# Altium PCB PCB1.PcbDoc (part 2 of 3)
Units mil, origin at the board's own origin, x right, y up, seen from the top; angles counter-clockwise.
Board outline 970.61 x 1495 mil, 4 copper layers (Top Layer, Mid-Layer 1, Mid-Layer 2, Bottom Layer); 18 components, 0 nets, 96 pads, 58 vias.
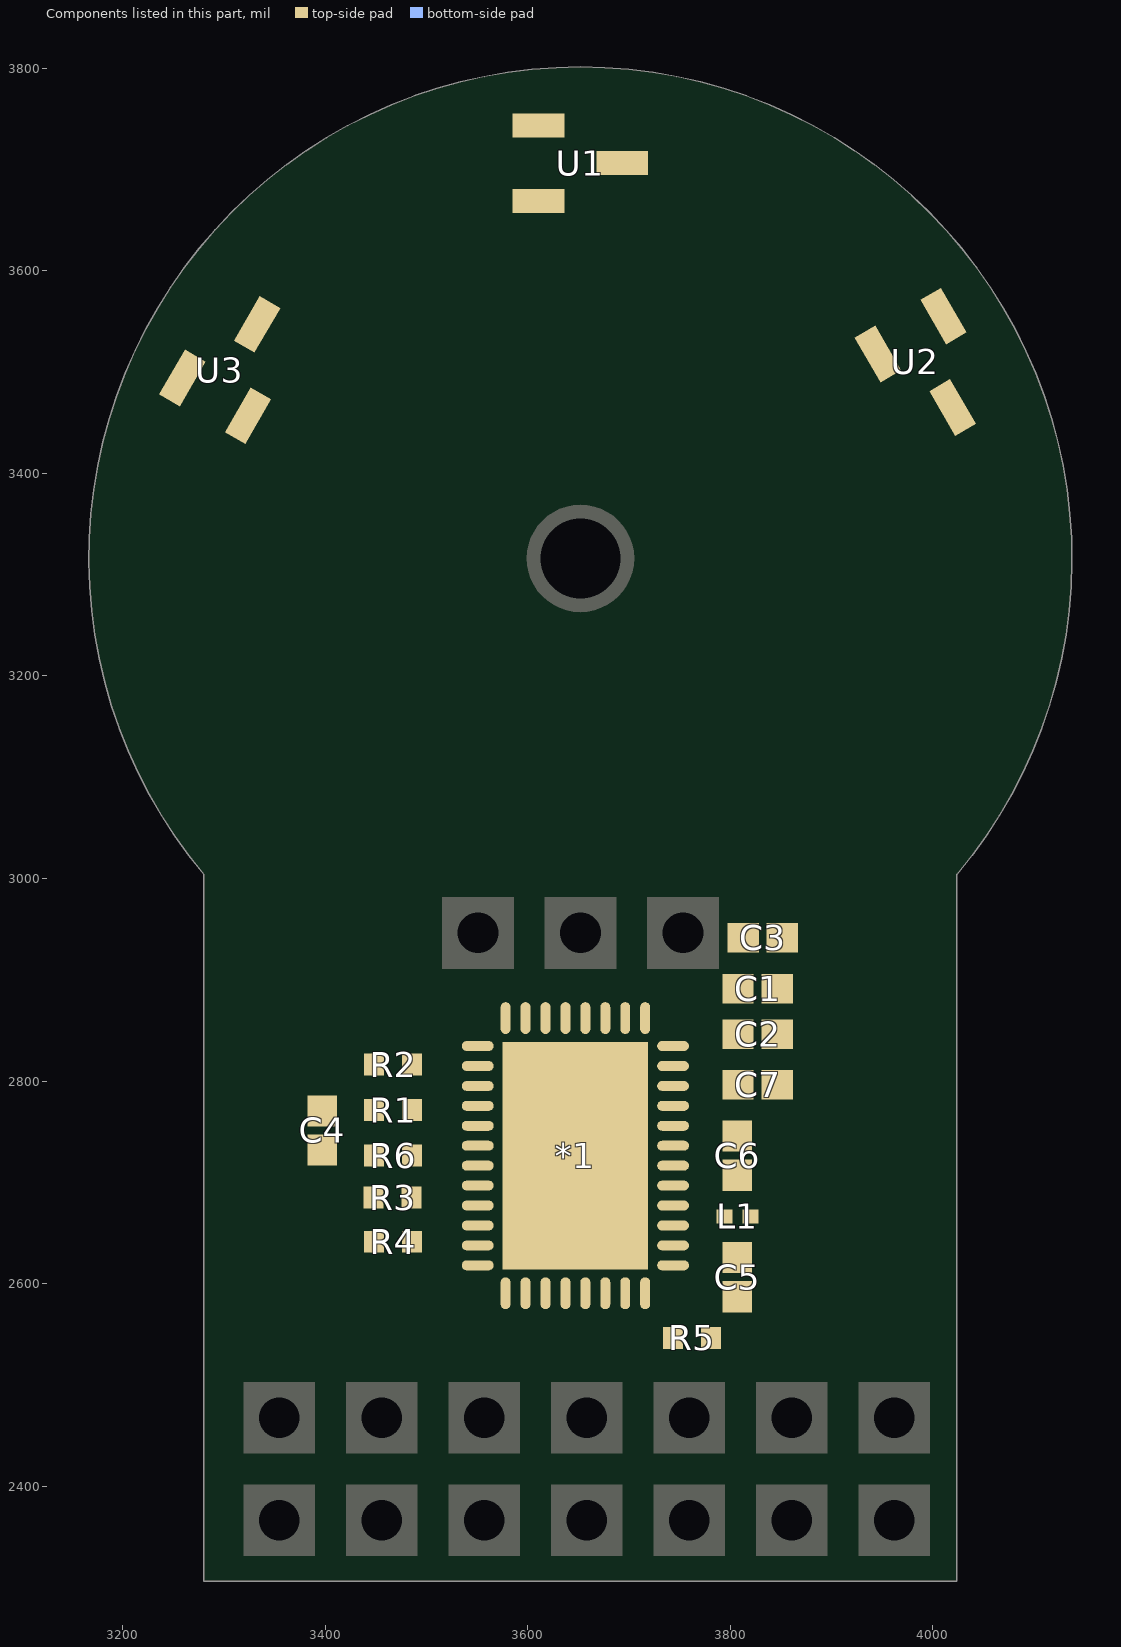
[diagram p4: the components of this part, seen from the top]

## Via types
v1: diameter 15.75, hole 7.87, Top Layer to Bottom Layer, tented both sides, 24 vias
v2: diameter 23.62, hole 11.81, Top Layer to Bottom Layer, tented both sides, 19 vias
v3: diameter 19.68, hole 7.87, Top Layer to Bottom Layer, 15 vias

## Nets (pads, with @x,y where several pads share a name; then routed paths per layer and width w, separated by ;. In a path a pad name is that pad's centre, name@x,y a point inside that pad or via, vN(x,y) a via of type N, cw(c..) or ccw(c..) an arc to the next point about the centre after c; other vN are vias at no path point) (continued)
copper on no net: | length 112377.2
  Top Layer w3.94: 3449.32,3166.42 3413.59,3212.76 cw(c3461.5,3235.4) 3461.5,3288.4 3513.78,3288.4 cw(c3511.75,3238.28) 3554.64,3264.29 ccw(c3652.01,3315.95) 3556.55,3260.84 cw(c3514.62,3233.32) 3559.03,3210.02 3532.89,3164.75 cw(c3487,3191.24) 3443.43,3161.07 3405.93,3210.57 cw(c3461.5,3235.4) 3461.5,3296.27 3513.62,3296.27 cw(c3511.75,3238.28) 3561.59,3267.98 ccw(c3652.01,3315.95) 3563.36,3264.77 ; 3449.32,3465.49 3413.59,3419.15 ccw(c3461.5,3396.51) 3461.5,3343.51 3513.78,3343.51 ccw(c3511.75,3393.62) 3554.64,3367.62 cw(c3652.01,3315.95) 3556.55,3371.07 ccw(c3514.62,3398.59) 3559.03,3421.88 3532.89,3467.16 ccw(c3487,3440.67) 3443.43,3470.84 3405.93,3421.34 ccw(c3461.5,3396.51) 3461.5,3335.64 3513.62,3335.64 ccw(c3511.75,3393.62) 3561.59,3363.93 cw(c3652.01,3315.95) 3563.36,3367.13 ; 3449.33,3166.42 ccw(c3487,3191.24) 3526.07,3168.68 3551.2,3212.2 ccw(c3514.62,3233.32) 3551.3,3254.25 ; 3449.33,3465.49 cw(c3487,3440.67) 3526.07,3463.23 3551.2,3419.71 cw(c3514.62,3398.59) 3551.3,3377.66 ; 3456.17,3233.27 cw(c3461.5,3235.4) 3461.5,3241.15 3511.75,3241.15 cw(c3511.75,3238.28) 3514.25,3239.68 ; 3456.36,3232.77 v1(3477.26,3216.19) ; v1(3498.58,3404.54) 3503.63,3423.36 3491.98,3443.54 ccw(c3487,3440.67) 3482.48,3444.22 3482.15,3443.8 3449.17,3402.3 ccw(c3461.5,3396.51) 3461.5,3382.88 3511.75,3382.88 ccw(c3511.75,3393.62) 3520.87,3387.95 ; 3514.39,3239.41 ccw(c3511.75,3238.28) 3514.26,3239.66 3515.63,3237.21 3517.08,3234.79 ; 3516.91,3235.04 cw(c3514.62,3233.32) 3517.08,3234.79 ; 3521.4,3243 ccw(c3511.75,3238.28) 3520.87,3243.96 ; 3521.4,3388.91 cw(c3511.75,3393.62) 3520.87,3387.95 ; 3523.53,3239.32 cw(c3514.62,3233.32) 3524.09,3238.37 cw(c3514.62,3233.32) 3523.92,3227.95 3498.8,3184.43 cw(c3487,3191.24) 3475.82,3183.46 3442.35,3225.5 cw(c3461.5,3235.4) 3463.21,3256.9 3511.75,3256.9 cw(c3511.75,3238.28) 3527.68,3247.91 ; 3523.53,3392.59 ccw(c3514.62,3398.59) 3524.09,3393.53 ; 3524.09,3238.38 cw(c3652.01,3315.95) 3522.45,3241.15 cw(c3652.01,3315.95) 3520.87,3243.96 ; 3528.36,3246.68 ccw(c3511.75,3238.28) 3527.68,3247.91 ; 3528.36,3385.23 cw(c3511.75,3393.62) 3527.68,3383.99 ; 3530.19,3243.51 cw(c3514.62,3233.32) 3530.92,3242.3 ; 3530.19,3388.4 ccw(c3514.62,3398.59) 3530.92,3389.61 ; 3535.31,3250.39 ccw(c3511.75,3238.28) 3534.52,3251.83 ; 3535.31,3381.51 cw(c3511.75,3393.62) 3534.52,3380.08 ; 3536.88,3247.67 cw(c3514.62,3233.32) 3537.73,3246.26 ; 3536.88,3384.24 ccw(c3514.62,3398.59) 3537.73,3385.65 ; 3541.36,3255.72 ccw(c3652.01,3315.95) 3542.91,3252.96 ccw(c3652.01,3315.95) 3544.52,3250.25 ; 3541.36,3376.19 cw(c3652.01,3315.95) 3542.91,3378.95 cw(c3652.01,3315.95) 3544.52,3381.66 ; 3542.24,3254.13 ccw(c3511.75,3238.28) 3511.75,3272.65 3461.23,3272.65 ccw(c3461.5,3235.4) 3428.2,3218.73 3462.49,3175.06 ccw(c3487,3191.24) 3512.43,3176.56 3537.56,3220.07 ccw(c3514.62,3233.32) 3537.73,3246.26 ; 3542.24,3377.77 cw(c3511.75,3393.62) 3511.75,3359.26 3461.23,3359.26 cw(c3461.5,3396.51) 3428.2,3413.18 3462.49,3456.85 cw(c3487,3440.67) 3512.43,3455.35 3537.56,3411.84 cw(c3514.62,3398.59) 3537.73,3385.65 ; 3543.59,3251.8 cw(c3514.62,3233.32) 3544.38,3216.14 3519.12,3172.39 cw(c3487,3191.24) 3455.91,3170.73 3421.16,3215.19 cw(c3461.5,3235.4) 3461.5,3280.52 3511.75,3280.52 cw(c3511.75,3238.28) 3548.22,3259.59 ; 3543.59,3380.11 ccw(c3514.62,3398.59) 3544.38,3415.77 3519.12,3459.52 ccw(c3487,3440.67) 3455.91,3461.18 3421.16,3416.72 ccw(c3461.5,3396.51) 3461.5,3351.39 3511.75,3351.39 ccw(c3511.75,3393.62) 3548.22,3372.32 ; 3544.91,3088.82 cw(c3626.52,3110.69) 3553.35,3152.93 3569.89,3181.58 3579.22,3197.74 ccw(c3514.62,3233.32) 3577,3272.65 ; 3545.08,3088.2 3547.34,3078.9 cw(c3505.36,3061.94) 3550.62,3060.72 ; 3578.6,3269.99 cw(c3652.01,3315.95) 3577,3272.65 ; 3595.08,3348.83 3577,3359.26 cw(c3511.75,3393.62) 3513.24,3319.89 3461.5,3319.89 cw(c3461.5,3396.51) 3391.06,3426.63 3431.93,3481.81 cw(c3487,3440.67) 3546.53,3475.04 3572.5,3430.06 cw(c3514.62,3398.59) 3570.18,3363.2 cw(c3511.75,3393.62) 3513.44,3327.77 3461.5,3327.77 cw(c3461.5,3396.51) 3398.34,3423.62 3437.71,3476.38 cw(c3487,3440.67) 3539.71,3471.1 3565.77,3425.96 cw(c3514.62,3398.59) 3565.25,3370.27 ; 3625.7,3105 cw(c3626.52,3110.69) 3621.54,3113.57 3646.66,3157.08 cw(c3649.15,3155.65) 3649.18,3158.51 ; 3625.96,3104.96 3627.46,3104.96 v1(3651.04,3114.73) ; 3648.86,3190.01 ccw(c3652.01,3315.95) 3652.01,3189.97 ccw(c3652.01,3315.95) 3655.17,3190.01 ; 3648.86,3441.9 cw(c3652.01,3315.95) 3652.01,3441.94 cw(c3652.01,3315.95) 3655.17,3441.9 ; 3649.49,3158.49 ccw(c3649.15,3155.65) 3649.2,3158.51 ; 3649.89,3166.36 ccw(c3649.15,3155.65) 3648.79,3166.38 ; 3649.89,3465.55 cw(c3649.15,3476.26) 3648.79,3465.53 ; 3650.18,3174.23 ccw(c3649.15,3155.65) 3648.77,3174.26 ; 3650.18,3457.67 cw(c3649.15,3476.26) 3648.77,3457.65 ; 3650.44,3182.11 ccw(c3649.15,3155.65) 3648.8,3182.13 ; 3650.44,3449.8 cw(c3649.15,3476.26) 3648.8,3449.77 ; 3650.66,3189.98 ccw(c3649.15,3155.65) 3619.39,3172.83 3594.13,3129.08 ccw(c3626.52,3110.69) 3624.3,3073.51 3679.27,3081.37 ccw(c3677.51,3110.69) 3702.94,3125.38 3677.82,3168.89 ccw(c3654.88,3155.65) 3655.23,3182.13 ccw(c3654.88,3155.65) 3653.59,3182.11 ; 3650.66,3441.93 cw(c3649.15,3476.26) 3619.39,3459.08 3594.13,3502.83 cw(c3626.52,3521.22) 3624.3,3558.4 3679.27,3550.53 cw(c3677.51,3521.22) 3702.94,3506.53 3677.82,3463.02 cw(c3654.88,3476.26) 3655.23,3449.77 cw(c3654.88,3476.26) 3653.59,3449.8 ; 3652.01,3381.7 3652.01,3402.57 cw(c3649.15,3476.26) 3586.04,3438.11 3576.71,3454.26 3560.17,3482.91 cw(c3626.52,3521.22) 3617.39,3597.29 3685.61,3589.48 cw(c3677.51,3521.22) 3737.04,3486.85 3711.07,3441.87 cw(c3654.88,3476.26) 3652.01,3410.44 cw(c3649.15,3476.26) 3592.96,3441.87 3566.99,3486.85 cw(c3626.52,3521.22) 3618.42,3589.48 3683.79,3581.76 cw(c3677.51,3521.22) 3730.22,3490.78 3704.16,3445.65 cw(c3654.88,3476.26) 3655.67,3418.25 ; v1(3652.01,3493.12) 3670.84,3498.16 3682.49,3518.34 ccw(c3677.51,3521.22) 3678.33,3526.91 3677.8,3526.98 3625.37,3534.79 ccw(c3626.52,3521.22) 3614.72,3514.41 3639.84,3470.89 ccw(c3649.15,3476.26) 3648.79,3465.53 ; 3653.36,3189.98 cw(c3654.88,3155.65) 3684.64,3172.83 3709.9,3129.08 cw(c3677.51,3110.69) 3679.73,3073.51 3623.85,3065.65 cw(c3626.52,3110.69) 3587.44,3133.25 3612.57,3176.77 cw(c3649.15,3155.65) 3648.93,3197.88 ; 3653.36,3441.93 ccw(c3654.88,3476.26) 3684.64,3459.08 3709.9,3502.83 ccw(c3677.51,3521.22) 3679.73,3558.4 3623.85,3566.26 ccw(c3626.52,3521.22) 3587.44,3498.66 3612.57,3455.14 ccw(c3649.15,3476.26) 3648.93,3434.02 ; 3653.84,3174.23 cw(c3654.88,3155.65) 3655.25,3174.26 ; 3653.84,3457.67 ccw(c3654.88,3476.26) 3655.25,3457.65 ; 3654.14,3166.36 cw(c3654.88,3155.65) 3655.24,3166.38 ; 3654.14,3465.55 ccw(c3654.88,3476.26) 3655.24,3465.53 ; 3654.54,3158.49 cw(c3654.88,3155.65) 3654.83,3158.51 ; 3655.11,3229.4 cw(c3652.01,3315.95) 3652.01,3229.34 ; 3655.22,3182.13 cw(c3652.01,3315.95) 3652.01,3182.1 cw(c3652.01,3315.95) 3648.8,3182.13 ; 3655.22,3449.77 ccw(c3652.01,3315.95) 3652.01,3449.81 ccw(c3652.01,3315.95) 3648.8,3449.77 ; 3708.95,3348.83 3727.02,3359.26 cw(c3789.41,3398.59) 3724.81,3434.17 3734.14,3450.33 3750.68,3478.97 cw(c3817.03,3440.67) 3878.34,3486.61 3905.69,3423.62 cw(c3842.52,3396.51) 3842.52,3327.77 3790.59,3327.77 cw(c3792.28,3393.62) 3733.84,3363.2 cw(c3789.41,3398.59) 3731.53,3430.06 3757.5,3475.04 cw(c3817.03,3440.67) 3872.09,3481.81 3898.09,3421.34 cw(c3842.52,3396.51) 3842.52,3335.64 3790.41,3335.64 cw(c3792.28,3393.62) 3742.44,3363.93 ; 3728.52,3275.36 cw(c3652.01,3315.95) 3727.02,3272.65 ; 3753.57,3057.88 cw(c3798.67,3061.94) 3802.05,3107.09 3816.63,3106.76 ccw(c3817.03,3191.24) 3885.2,3141.34 ; 3759.51,3250.25 ccw(c3652.01,3315.95) 3761.12,3252.96 ccw(c3652.01,3315.95) 3762.66,3255.72 ; 3759.51,3381.66 cw(c3652.01,3315.95) 3761.12,3378.95 cw(c3652.01,3315.95) 3762.66,3376.19 ; 3760.44,3251.8 ccw(c3789.41,3233.32) 3759.65,3216.14 3784.91,3172.39 ccw(c3817.03,3191.24) 3848.12,3170.73 3868.8,3222.27 ccw(c3842.52,3235.4) 3842.52,3264.77 3792.28,3264.77 ccw(c3792.28,3238.28) 3769.51,3251.83 ; 3760.44,3380.11 cw(c3789.41,3398.59) 3759.65,3415.77 3784.91,3459.52 cw(c3817.03,3440.67) 3848.12,3461.18 3868.8,3409.64 cw(c3842.52,3396.51) 3842.52,3367.14 3792.28,3367.14 cw(c3792.28,3393.62) 3769.51,3380.08 ; 3761.79,3254.13 cw(c3792.28,3238.28) 3792.28,3272.65 3842.8,3272.65 cw(c3842.52,3235.4) 3875.83,3218.73 3854.7,3166.42 cw(c3817.03,3191.24) 3777.95,3168.68 3752.83,3212.2 cw(c3789.41,3233.32) 3752.72,3254.25 ; 3761.79,3377.77 ccw(c3792.28,3393.62) 3792.28,3359.26 3842.8,3359.26 ccw(c3842.52,3396.51) 3875.83,3413.18 3854.7,3465.49 ccw(c3817.03,3440.67) 3777.95,3463.23 3752.83,3419.71 ccw(c3789.41,3398.59) 3752.72,3377.66 ; 3767.14,3247.67 ccw(c3789.41,3233.32) 3766.3,3246.26 ; 3767.14,3384.24 cw(c3789.41,3398.59) 3766.3,3385.65 ; 3768.72,3250.39 cw(c3792.28,3238.28) 3769.51,3251.83 ; 3768.72,3381.51 ccw(c3792.28,3393.62) 3769.51,3380.08 ; 3773.83,3243.51 ccw(c3789.41,3233.32) 3773.1,3242.3 ; 3773.83,3388.4 cw(c3789.41,3398.59) 3773.1,3389.61 ; 3775.66,3246.68 cw(c3792.28,3238.28) 3776.35,3247.91 ; 3775.66,3385.23 ccw(c3792.28,3393.62) 3776.35,3383.99 ; 3779.93,3238.38 ccw(c3652.01,3315.95) 3781.58,3241.15 ccw(c3652.01,3315.95) 3783.16,3243.96 ; 3780.5,3239.32 ccw(c3789.41,3233.32) 3779.93,3238.37 ccw(c3789.41,3233.32) 3780.11,3227.95 3805.23,3184.43 ccw(c3817.03,3191.24) 3828.21,3183.46 3847.66,3232.77 3847.86,3233.27 ccw(c3842.52,3235.4) 3842.52,3241.15 3792.28,3241.15 ccw(c3792.28,3238.28) 3789.77,3239.68 ; 3780.5,3392.59 cw(c3789.41,3398.59) 3779.93,3393.53 ; 3782.63,3243 cw(c3792.28,3238.28) 3783.16,3243.96 ; 3782.63,3388.91 ccw(c3792.28,3393.62) 3783.16,3387.95 ; 3787.12,3235.04 ccw(c3789.41,3233.32) 3786.95,3234.79 ; 3789.64,3239.41 cw(c3792.28,3238.28) 3789.76,3239.66 3788.4,3237.21 3786.95,3234.79 ; v1(3805.44,3404.54) 3819.22,3390.76 3842.52,3390.76 ccw(c3842.52,3396.51) 3847.86,3398.64 3847.66,3399.14 3828.21,3448.45 ccw(c3817.03,3440.67) 3805.23,3447.48 3780.11,3403.96 ccw(c3789.41,3398.59) 3779.93,3393.53 ; v1(3825.79,3214.5) 3821.55,3187.69 cw(c3817.03,3191.24) 3812.05,3188.37 3786.93,3231.88 cw(c3789.41,3233.32) 3786.95,3234.79 ; 3866.32,3476.37 3890.43,3419.15 cw(c3842.52,3396.51) 3842.52,3343.51 3790.24,3343.51 cw(c3792.28,3393.62) 3747.48,3371.07 ccw(c3652.01,3315.95) 3745.45,3374.45 cw(c3789.41,3398.59) 3744.99,3421.88 3771.14,3467.16 cw(c3817.03,3440.67) 3860.59,3470.84 3882.86,3416.72 cw(c3842.52,3396.51) 3842.52,3351.39 3792.28,3351.39 cw(c3792.28,3393.62) 3755.81,3372.32 ; 3866.32,3476.38 ccw(c3817.03,3440.67) 3764.32,3471.1 3738.26,3425.96 ccw(c3789.41,3398.59) 3738.77,3370.27 cw(c3652.01,3315.95) 3740.66,3367.14 ; 3884.84,3140.49 3885.2,3141.34 ; 3886.04,3142.51 cw(c3817.03,3191.24) 3885.2,3141.34 ; 3517.08,3234.79 cw(c3514.62,3233.32) 3517.1,3231.88 3491.98,3188.37 cw(c3487,3191.24) 3482.48,3187.69 3482.15,3188.11 3449.17,3229.61 cw(c3461.5,3235.4) 3461.5,3249.03 3511.75,3249.03 cw(c3511.75,3238.28) 3520.87,3243.96 ; 3520.87,3387.95 cw(c3652.01,3315.95) 3522.45,3390.76 cw(c3652.01,3315.95) 3524.09,3393.53 ; 3524.09,3393.53 ccw(c3514.62,3398.59) 3523.92,3403.96 3498.8,3447.48 ccw(c3487,3440.67) 3475.82,3448.45 3442.35,3406.41 ccw(c3461.5,3396.51) 3463.21,3375.01 3511.75,3375.01 ccw(c3511.75,3393.62) 3527.68,3383.99 ; 3527.68,3247.91 ccw(c3652.01,3315.95) 3529.27,3245.09 ccw(c3652.01,3315.95) 3530.92,3242.3 ; 3527.68,3384 cw(c3652.01,3315.95) 3529.27,3386.82 cw(c3652.01,3315.95) 3530.92,3389.61 ; 3530.92,3242.3 cw(c3514.62,3233.32) 3530.74,3224.01 3506.47,3181.97 cw(c3487,3191.24) 3468.84,3179.61 3435.23,3222.27 cw(c3461.5,3235.4) 3461.5,3264.77 3511.75,3264.77 cw(c3511.75,3238.28) 3534.52,3251.83 ; 3530.92,3389.61 ccw(c3514.62,3398.59) 3530.74,3407.9 3506.47,3449.94 ccw(c3487,3440.67) 3468.84,3452.3 3435.23,3409.64 ccw(c3461.5,3396.51) 3461.5,3367.14 3511.75,3367.14 ccw(c3511.75,3393.62) 3534.52,3380.08 ; 3534.52,3251.83 ccw(c3652.01,3315.95) 3536.09,3249.03 ccw(c3652.01,3315.95) 3537.73,3246.26 ; 3534.52,3380.08 cw(c3652.01,3315.95) 3536.09,3382.88 cw(c3652.01,3315.95) 3537.73,3385.65 ; 3548.22,3259.59 ccw(c3652.01,3315.95) 3549.16,3257.89 ; 3548.22,3259.59 cw(c3511.75,3238.28) 3549.16,3257.89 ; 3548.22,3372.32 ccw(c3511.75,3393.62) 3549.16,3374.02 ; 3548.22,3372.32 cw(c3652.01,3315.95) 3549.16,3374.02 ; 3549.16,3257.89 ccw(c3652.01,3315.95) 3549.73,3256.9 ccw(c3652.01,3315.95) 3550.3,3255.91 ; 3549.16,3374.02 cw(c3652.01,3315.95) 3549.73,3375.01 cw(c3652.01,3315.95) 3550.3,3376 ; 3550.3,3255.91 ccw(c3652.01,3315.95) 3551.3,3254.25 ; 3550.3,3255.91 cw(c3514.62,3233.32) 3551.3,3254.25 ; 3550.3,3376 cw(c3652.01,3315.95) 3551.3,3377.66 ; 3550.3,3376 ccw(c3514.62,3398.59) 3551.3,3377.66 ; 3563.36,3264.77 ccw(c3652.01,3315.95) 3565.25,3261.64 ; 3563.36,3264.77 cw(c3514.62,3233.32) 3565.25,3261.64 ; 3563.36,3367.14 ccw(c3514.62,3398.59) 3565.25,3370.27 ; 3563.36,3367.14 cw(c3652.01,3315.95) 3565.25,3370.27 ; 3565.25,3261.64 cw(c3514.62,3233.32) 3565.77,3205.95 3539.71,3160.81 cw(c3487,3191.24) 3437.71,3155.53 3398.34,3208.29 cw(c3461.5,3235.4) 3461.5,3304.14 3513.44,3304.14 cw(c3511.75,3238.28) 3570.18,3268.71 cw(c3514.62,3233.32) 3572.5,3201.85 3546.53,3156.87 cw(c3487,3191.24) 3431.94,3150.09 3391.06,3205.28 cw(c3461.5,3235.4) 3461.5,3312.02 3513.24,3312.02 cw(c3511.75,3238.28) 3577,3272.65 ; 3617.39,3034.62 cw(c3626.52,3110.69) 3560.17,3149 3576.71,3177.65 3586.03,3193.8 cw(c3649.15,3155.65) 3652.01,3229.34 ; 3617.39,3034.62 3685.61,3042.43 ; 3617.39,3034.62 3685.61,3042.43 ; 3618.42,3042.43 cw(c3626.52,3110.69) 3566.99,3145.06 3592.95,3190.04 cw(c3649.15,3155.65) 3652.01,3221.47 cw(c3654.88,3155.65) 3711.07,3190.04 3737.04,3145.06 cw(c3677.51,3110.69) 3685.62,3042.43 ; 3618.42,3042.43 3683.79,3050.15 ; 3618.42,3042.43 3683.79,3050.15 ; 3648.77,3174.26 ccw(c3652.01,3315.95) 3652.01,3174.22 ccw(c3652.01,3315.95) 3655.25,3174.26 ; 3648.77,3174.26 ccw(c3649.15,3155.65) 3633.02,3164.96 3608.75,3122.92 ccw(c3626.52,3110.69) 3625.52,3089.15 3678.66,3097.12 ccw(c3677.51,3110.69) 3689.31,3117.5 3664.18,3161.02 ccw(c3654.88,3155.65) 3655.24,3166.38 ; 3648.77,3457.65 cw(c3649.15,3476.26) 3633.02,3466.95 3608.75,3508.99 cw(c3626.52,3521.22) 3625.52,3542.76 3678.66,3534.79 cw(c3677.51,3521.22) 3689.31,3514.41 3664.18,3470.89 cw(c3654.88,3476.26) 3655.24,3465.53 ; 3648.77,3457.65 cw(c3652.01,3315.95) 3652.01,3457.69 cw(c3652.01,3315.95) 3655.25,3457.65 ; 3648.79,3166.38 ccw(c3652.01,3315.95) 3652.01,3166.35 ccw(c3652.01,3315.95) 3655.24,3166.38 ; 3648.79,3166.38 ccw(c3649.15,3155.65) 3639.84,3161.02 3614.72,3117.5 ccw(c3626.52,3110.69) 3625.37,3097.12 3677.8,3104.93 3678.33,3105 ccw(c3677.51,3110.69) 3682.49,3113.57 3657.36,3157.08 ccw(c3654.88,3155.65) 3654.84,3158.51 ; 3648.8,3182.13 ccw(c3649.15,3155.65) 3626.21,3168.89 3601.08,3125.38 ccw(c3626.52,3110.69) 3624.75,3081.37 3678.51,3089.15 ccw(c3677.51,3110.69) 3695.27,3122.92 3671,3164.96 ccw(c3654.88,3155.65) 3655.25,3174.26 ; 3648.8,3449.77 cw(c3649.15,3476.26) 3626.21,3463.02 3601.08,3506.53 cw(c3626.52,3521.22) 3624.75,3550.53 3678.51,3542.76 cw(c3677.51,3521.22) 3695.27,3508.99 3671,3466.95 cw(c3654.88,3476.26) 3655.25,3457.65 ; 3648.79,3465.53 cw(c3652.01,3315.95) 3652.01,3465.56 cw(c3652.01,3315.95) 3655.24,3465.53 ; 3648.93,3197.88 cw(c3649.15,3155.65) 3650.87,3197.85 ; 3648.93,3197.88 ccw(c3652.01,3315.95) 3650.87,3197.85 ; 3648.93,3434.02 ccw(c3649.15,3476.26) 3650.87,3434.06 ; 3648.93,3434.02 cw(c3652.01,3315.95) 3650.87,3434.06 ; 3649.2,3158.51 3652.01,3158.47 3654.83,3158.51 ; 3650.87,3197.85 ccw(c3652.01,3315.95) 3652.01,3197.84 ccw(c3652.01,3315.95) 3653.16,3197.85 ; 3650.87,3434.06 cw(c3652.01,3315.95) 3652.01,3434.06 cw(c3652.01,3315.95) 3653.16,3434.06 ; 3652.01,3213.59 cw(c3654.88,3155.65) 3655.67,3213.66 ; 3652.01,3213.59 ccw(c3652.01,3315.95) 3655.67,3213.66 ; 3652.01,3213.59 cw(c3652.01,3315.95) 3648.35,3213.66 ccw(c3649.15,3155.65) 3599.86,3186.26 3573.81,3141.12 ccw(c3626.52,3110.69) 3620.24,3050.15 3681.85,3057.88 ccw(c3677.51,3110.69) 3723.4,3137.19 3697.26,3182.46 ccw(c3654.88,3155.65) 3652.01,3205.72 cw(c3652.01,3315.95) 3648.07,3205.79 ccw(c3649.15,3155.65) 3606.77,3182.47 3580.62,3137.19 ccw(c3626.52,3110.69) 3622.17,3057.88 3680.17,3065.65 ccw(c3677.51,3110.69) 3716.58,3133.25 3691.46,3176.77 ccw(c3654.88,3155.65) 3655.09,3197.88 ; 3652.01,3229.34 cw(c3654.88,3155.65) 3717.99,3193.8 3727.32,3177.65 3743.86,3149 cw(c3677.51,3110.69) 3686.64,3034.62 ; 3652.01,3418.32 cw(c3652.01,3315.95) 3655.67,3418.25 ; 3652.01,3418.32 ccw(c3654.88,3476.26) 3655.67,3418.25 ; 3652.01,3418.32 ccw(c3652.01,3315.95) 3648.35,3418.25 cw(c3649.15,3476.26) 3599.86,3445.65 3573.81,3490.78 cw(c3626.52,3521.22) 3620.24,3581.76 3681.85,3574.03 cw(c3677.51,3521.22) 3723.4,3494.72 3697.26,3449.44 cw(c3654.88,3476.26) 3652.01,3426.19 ccw(c3652.01,3315.95) 3648.07,3426.12 cw(c3649.15,3476.26) 3606.77,3449.44 3580.62,3494.72 cw(c3626.52,3521.22) 3622.17,3574.03 3680.17,3566.26 cw(c3677.51,3521.22) 3716.58,3498.66 3691.46,3455.14 cw(c3654.88,3476.26) 3655.09,3434.02 ; 3653.16,3197.85 cw(c3654.88,3155.65) 3655.09,3197.88 ; 3653.16,3197.85 ccw(c3652.01,3315.95) 3655.09,3197.88 ; 3653.16,3434.06 cw(c3652.01,3315.95) 3655.09,3434.02 ; 3653.16,3434.06 ccw(c3654.88,3476.26) 3655.09,3434.02 ; 3655.67,3213.66 cw(c3654.88,3155.65) 3704.16,3186.26 3730.22,3141.12 cw(c3677.51,3110.69) 3683.79,3050.15 ; 3660.93,3031.68 ccw(c3660.93,3022.76) 3652.01,3022.76 cw(c3660.93,3022.76) 3660.93,3031.68 ; 3660.93,3031.68 3686.64,3034.62 ; 3660.93,3031.68 3686.64,3034.62 ; 3727.02,3272.65 cw(c3792.28,3238.28) 3790.59,3312.01 ; 3727.02,3272.65 ccw(c3789.41,3233.32) 3724.81,3197.74 3734.14,3181.58 3750.68,3152.94 ccw(c3817.03,3191.24) 3878.34,3145.3 3905.69,3208.29 ccw(c3842.52,3235.4) 3842.52,3304.14 3790.59,3304.14 ccw(c3792.28,3238.28) 3733.84,3268.71 ccw(c3789.41,3233.32) 3731.53,3201.85 3757.5,3156.87 ccw(c3817.03,3191.24) 3872.09,3150.1 3898.09,3210.57 ccw(c3842.52,3235.4) 3842.52,3296.27 3790.41,3296.27 ccw(c3792.28,3238.28) 3742.44,3267.98 ; 3740.66,3264.77 cw(c3792.28,3238.28) 3742.44,3267.98 ; 3740.66,3264.77 ccw(c3652.01,3315.95) 3742.43,3267.98 ; 3740.66,3264.77 cw(c3652.01,3315.95) 3738.77,3261.64 ccw(c3789.41,3233.32) 3738.26,3205.95 3764.32,3160.81 ccw(c3817.03,3191.24) 3866.32,3155.53 3890.43,3212.76 ccw(c3842.52,3235.4) 3842.52,3288.4 3790.24,3288.4 ccw(c3792.28,3238.28) 3747.48,3260.84 cw(c3652.01,3315.95) 3745.45,3257.46 ccw(c3789.41,3233.32) 3744.99,3210.02 3771.14,3164.75 ccw(c3817.03,3191.24) 3860.59,3161.07 3882.86,3215.19 ccw(c3842.52,3235.4) 3842.52,3280.52 3792.28,3280.52 ccw(c3792.28,3238.28) 3755.81,3259.59 ; 3740.66,3367.14 cw(c3652.01,3315.95) 3742.43,3363.93 ; 3740.66,3367.14 ccw(c3792.28,3393.62) 3742.44,3363.93 ; 3752.72,3254.25 cw(c3789.41,3233.32) 3753.72,3255.91 ; 3752.72,3254.25 ccw(c3652.01,3315.95) 3753.72,3255.91 ; 3752.72,3377.66 ccw(c3789.41,3398.59) 3753.72,3376 ; 3752.72,3377.66 cw(c3652.01,3315.95) 3753.72,3376 ; 3753.72,3255.91 ccw(c3652.01,3315.95) 3754.3,3256.9 ccw(c3652.01,3315.95) 3754.87,3257.89 ; 3753.72,3376 cw(c3652.01,3315.95) 3754.3,3375.01 cw(c3652.01,3315.95) 3754.87,3374.02 ; 3754.87,3257.89 ccw(c3652.01,3315.95) 3755.81,3259.59 ; 3754.87,3257.89 cw(c3792.28,3238.28) 3755.81,3259.59 ; 3754.87,3374.02 ccw(c3792.28,3393.62) 3755.81,3372.32 ; 3754.87,3374.02 cw(c3652.01,3315.95) 3755.81,3372.32 ; 3766.3,3246.26 ccw(c3652.01,3315.95) 3767.94,3249.03 ccw(c3652.01,3315.95) 3769.51,3251.83 ; 3766.3,3246.26 ccw(c3789.41,3233.32) 3766.47,3220.07 3791.59,3176.56 ccw(c3817.03,3191.24) 3841.54,3175.06 3861.68,3225.5 ccw(c3842.52,3235.4) 3840.82,3256.9 3792.28,3256.9 ccw(c3792.28,3238.28) 3776.35,3247.91 ; 3766.3,3385.65 cw(c3652.01,3315.95) 3767.94,3382.88 cw(c3652.01,3315.95) 3769.51,3380.08 ; 3766.3,3385.65 cw(c3789.41,3398.59) 3766.47,3411.84 3791.59,3455.35 cw(c3817.03,3440.67) 3841.54,3456.85 3861.68,3406.41 cw(c3842.52,3396.51) 3840.82,3375.01 3792.28,3375.01 cw(c3792.28,3393.62) 3776.35,3383.99 ; 3773.11,3242.3 ccw(c3652.01,3315.95) 3774.76,3245.09 ccw(c3652.01,3315.95) 3776.34,3247.91 ; 3773.1,3242.3 ccw(c3789.41,3233.32) 3773.29,3224.01 3797.56,3181.97 ccw(c3817.03,3191.24) 3835.18,3179.61 3854.85,3229.61 ccw(c3842.52,3235.4) 3842.52,3249.03 3792.28,3249.03 ccw(c3792.28,3238.28) 3783.16,3243.96 ; 3773.11,3389.61 cw(c3652.01,3315.95) 3774.76,3386.82 cw(c3652.01,3315.95) 3776.34,3384 ; 3773.1,3389.61 cw(c3789.41,3398.59) 3773.29,3407.9 3797.56,3449.94 cw(c3817.03,3440.67) 3835.18,3452.3 3854.85,3402.3 cw(c3842.52,3396.51) 3842.52,3382.88 3792.28,3382.88 cw(c3792.28,3393.62) 3783.16,3387.95 ; 3779.93,3393.53 cw(c3652.01,3315.95) 3781.58,3390.76 cw(c3652.01,3315.95) 3783.16,3387.95 ; 3790.59,3312.01 cw(c3792.28,3238.28) 3790.79,3312.02 ; 3790.59,3312.02 3790.79,3312.02 ; 3790.79,3312.02 3842.52,3312.02 cw(c3842.52,3235.4) 3912.97,3205.28 3885.2,3141.34 ; 3693.35,3315.95 ccw(c3652.01,3315.95) 3693.35,3315.95
  Top Layer w7.87: 3676.54,2590.45 3676.54,2556.75 3722.53,2510.76 3817.26,2510.76 3860.56,2467.46 ; 3696.23,2590.45 3696.23,2552.06 3727.01,2521.27 3907.92,2521.27 3961.74,2467.46
  Top Layer w10: 3323.73,3456.77 ccw(c3652.01,3315.95) v2(3452.77,3019.48) ; 3332.68,3547.08 cw(c3652.01,3315.95) 3852.85,2976.76 3852.85,2942.82 ; 3354.65,2467.46 3354.65,2528.91 3416.19,2590.45 3578.12,2590.45 ; v2(3397.01,2691.27) 3397.01,2731.98 ; 3397.01,2770.57 3447.6,2770.57 3448.31,2771.27 ; 3448.31,2636.27 3448.31,2681.27 3448.31,2726.27 3448.31,2770.29 ; v2(3453.12,2980.34) cw(c3652.01,3315.95) 3305.21,3494.63 3351.97,3506.3 cw(c3652.01,3315.95) 3610.67,3668.87 ; 3455.83,2467.46 3455.83,2520.09 3487.01,2551.27 3582.01,2551.27 3597.8,2567.06 3597.8,2590.45 ; 3485.15,2684.86 3492.94,2677.06 3550.56,2677.06 ; 3485.71,2641.27 3489.3,2637.69 3550.56,2637.69 ; 3485.71,2726.27 3495.56,2716.43 3550.56,2716.43 ; 3485.71,2771.27 3509.61,2795.17 3550.56,2795.17 ; 3485.71,2816.27 3487.13,2814.86 3550.56,2814.86 ; v2(3522.01,2861.27) 3548.75,2834.54 3550.56,2834.54 ; 3550.56,2736.12 3593.86,2736.12 v3(3603.71,2726.27) ; 3550.56,2755.8 3506.09,2755.8 3501.8,2751.51 3467.09,2751.51 3448.31,2770.29 ; 3550.83,3060.72 3550.83,2946.27 3578.12,2918.99 3578.12,2862.1 3597.8,2862.1 ; 3557.01,2467.46 3557.01,2506.27 3577.01,2526.27 3592.01,2526.27 3617.49,2551.75 3617.49,2590.45 ; v3(3603.71,2812.89) 3608.63,2812.89 3617.49,2821.75 3617.49,2862.1 ; 3637.17,2590.45 3637.17,2488.48 3658.19,2467.46 ; 3637.17,2862.1 3656.86,2862.1 3656.86,2941.43 3652.01,2946.27 3652.01,3022.76 ; 3656.86,2590.45 3656.86,2556.43 3745.83,2467.46 3759.38,2467.46 ; 3657.01,2811.27 3676.54,2830.8 3676.54,2862.1 ; v3(3690.32,2639.66) 3692.29,2637.69 3743.47,2637.69 3760.6,2637.69 3777.01,2621.27 3777.01,2601.27 3791.3,2586.98 3807.01,2586.98 ; v3(3690.32,2682.97) 3696.23,2677.06 3743.47,2677.06 ; v3@3690.32,2721.27 3700.16,2711.43 ; v3(3690.32,2812.89) 3711.97,2834.54 3743.47,2834.54 ; 3696.23,2862.1 3715.91,2862.1 3715.91,2908.99 3753.19,2946.27 3753.19,3057.88 ; 3715.91,2590.45 3715.91,2553.68 3723.31,2546.27 3743.31,2546.27 ; 3743.47,2657.38 3775.2,2657.38 3807.01,2625.57 3819.81,2638.36 3819.81,2666.27 ; 3743.47,2696.75 3763.75,2696.75 3794.22,2666.27 ; 3743.47,2716.43 3797.56,2716.43 3807.01,2706.98 ; 3743.47,2736.12 3797.56,2736.12 3807.01,2745.57 ; 3743.47,2755.8 3771.54,2755.8 3787.01,2771.27 3827.01,2771.27 3846.3,2790.57 3846.3,2796.27 ; 3743.47,2775.49 3743.47,2814.86 3776.3,2814.86 3807.72,2846.27 3807.72,2891.27 ; 3743.47,2795.17 3806.62,2795.17 ; v2(3744.56,2891.07) 3785.27,2891.07 ; v2(3745.95,2856.27) 3786.66,2856.27 ; v2(3766.3,2856.27) 3807.01,2856.27 ; v2(3767.01,2891.27) 3807.72,2891.27 ; 3780.71,2546.27 3790.71,2536.27 3822.01,2536.27 3921.14,2635.4 ; 3807.72,2936.27 3807.72,2891.27 ; 3812.01,2926.27 v2(3812.01,2966.98) ; v2@3813.47,2998.24 ccw(c3652.01,3315.95) 3945.67,3517.88 ; 3846.3,2900.57 3846.3,2846.27 v2(3887.01,2846.27) ; 3846.3,2945.57 3846.3,2891.27 v2(3887.01,2891.27) ; 3851.3,2941.27 v2(3892.01,2941.27) ; 3961.74,2366.27 4007.01,2411.55 4007.01,2549.53 3921.14,2635.4 ; 3448.31,2770.29 3448.31,2771.27 ; 3448.31,2771.27 3448.31,2816.27 3448.31,2925.04 3423.54,2949.81 cw(c3652.01,3315.95) 3921.14,2978.57 3921.14,2635.4
  Top Layer w11.81: 3596.77,3347.85 cw(c3652.01,3315.95) 3707.65,3347.16
  Mid-Layer 1 w3.94: 3449.32,3465.49 3413.59,3419.15 ccw(c3461.5,3396.51) 3461.5,3343.51 3513.78,3343.51 ccw(c3511.75,3393.62) 3554.64,3367.62 cw(c3652.01,3315.95) 3556.55,3371.07 ccw(c3514.62,3398.59) 3559.03,3421.88 3532.89,3467.16 ccw(c3487,3440.67) 3443.43,3470.84 3405.93,3421.34 ccw(c3461.5,3396.51) 3461.5,3335.64 3513.62,3335.64 ccw(c3511.75,3393.62) 3561.59,3363.93 cw(c3652.01,3315.95) 3563.36,3367.13 ; 3449.33,3465.49 cw(c3487,3440.67) 3526.07,3463.23 3551.2,3419.71 cw(c3514.62,3398.59) 3551.3,3377.66 ; v1(3478.24,3417.41) 3456.16,3398.64 ccw(c3461.5,3396.51) 3461.5,3390.76 3511.75,3390.76 ccw(c3511.75,3393.62) 3514.25,3392.23 ; v1(3498.58,3227.37) 3484.8,3241.15 3461.5,3241.15 ccw(c3461.5,3235.4) 3456.17,3233.27 3456.36,3232.77 3475.82,3183.46 ccw(c3487,3191.24) 3498.8,3184.43 3523.92,3227.95 ccw(c3514.62,3233.32) 3524.09,3238.37 ccw(c3514.62,3233.32) 3523.53,3239.32 ; 3514.39,3392.5 cw(c3511.75,3393.62) 3514.25,3392.23 ; 3516.91,3396.87 ccw(c3514.62,3398.59) 3517.08,3397.12 ; 3521.4,3243 ccw(c3511.75,3238.28) 3520.87,3243.96 ; 3521.4,3388.91 cw(c3511.75,3393.62) 3520.87,3387.95 ; 3523.53,3392.59 ccw(c3514.62,3398.59) 3524.09,3393.53 ; 3524.09,3238.38 cw(c3652.01,3315.95) 3522.45,3241.15 cw(c3652.01,3315.95) 3520.87,3243.96 ; v1(3526.57,3106.46) 3547.58,3127.2 3564.12,3155.85 ; 3528.36,3246.68 ccw(c3511.75,3238.28) 3527.68,3247.91 ; 3528.36,3385.23 cw(c3511.75,3393.62) 3527.68,3383.99 ; 3530.19,3243.51 cw(c3514.62,3233.32) 3530.92,3242.3 ; 3530.19,3388.4 ccw(c3514.62,3398.59) 3530.92,3389.61 ; v1(3530.85,3522.24) 3536.81,3507.62 3553.35,3478.97 3569.89,3450.33 3579.22,3434.17 cw(c3514.62,3398.59) 3577,3359.26 ; 3535.31,3250.39 ccw(c3511.75,3238.28) 3534.52,3251.83 ; 3535.31,3381.51 cw(c3511.75,3393.62) 3534.52,3380.08 ; 3536.88,3247.67 cw(c3514.62,3233.32) 3537.73,3246.26 ; 3536.88,3384.24 ccw(c3514.62,3398.59) 3537.73,3385.65 ; 3541.36,3255.72 ccw(c3652.01,3315.95) 3542.91,3252.96 ccw(c3652.01,3315.95) 3544.52,3250.25 ; 3541.36,3376.19 cw(c3652.01,3315.95) 3542.91,3378.95 cw(c3652.01,3315.95) 3544.52,3381.66 ; 3542.24,3254.13 ccw(c3511.75,3238.28) 3511.75,3272.65 3461.23,3272.65 ccw(c3461.5,3235.4) 3428.2,3218.73 3449.32,3166.42 ccw(c3487,3191.24) 3526.07,3168.68 3551.2,3212.2 ccw(c3514.62,3233.32) 3551.3,3254.25 ; 3542.24,3377.77 cw(c3511.75,3393.62) 3511.75,3359.26 3461.23,3359.26 cw(c3461.5,3396.51) 3428.2,3413.18 3462.49,3456.85 cw(c3487,3440.67) 3512.43,3455.35 3537.56,3411.84 cw(c3514.62,3398.59) 3537.73,3385.65 ; 3543.59,3251.8 cw(c3514.62,3233.32) 3544.38,3216.14 3519.12,3172.39 cw(c3487,3191.24) 3455.91,3170.73 3435.23,3222.27 cw(c3461.5,3235.4) 3461.5,3264.77 3511.75,3264.77 cw(c3511.75,3238.28) 3534.52,3251.83 ; 3543.59,3380.11 ccw(c3514.62,3398.59) 3544.38,3415.77 3519.12,3459.52 ccw(c3487,3440.67) 3455.91,3461.18 3421.16,3416.72 ccw(c3461.5,3396.51) 3461.5,3351.39 3511.75,3351.39 ccw(c3511.75,3393.62) 3548.22,3372.32 ; 3560.17,3149 3576.71,3177.65 3586.03,3193.8 cw(c3649.15,3155.65) 3652.01,3229.34 ; 3578.6,3361.92 ccw(c3652.01,3315.95) 3577,3359.26 ; 3595.08,3283.08 3577,3272.65 cw(c3514.62,3233.32) 3579.22,3197.74 3569.89,3181.58 3553.35,3152.94 cw(c3487,3191.24) 3425.69,3145.3 3398.34,3208.29 cw(c3461.5,3235.4) 3461.5,3304.14 3513.44,3304.14 cw(c3511.75,3238.28) 3570.18,3268.71 cw(c3514.62,3233.32) 3572.5,3201.85 3546.53,3156.87 cw(c3487,3191.24) 3431.93,3150.1 3405.93,3210.57 cw(c3461.5,3235.4) 3461.5,3296.27 3513.62,3296.27 cw(c3511.75,3238.28) 3561.59,3267.98 ; 3625.7,3526.91 ccw(c3626.52,3521.22) 3621.54,3518.34 3646.66,3474.83 ccw(c3649.15,3476.26) 3649.18,3473.39 ; 3625.96,3526.95 v1(3652.99,3517.18) ; 3648.86,3190.01 ccw(c3652.01,3315.95) 3652.01,3189.97 ccw(c3652.01,3315.95) 3655.17,3190.01 ; 3648.86,3441.9 cw(c3652.01,3315.95) 3652.01,3441.94 cw(c3652.01,3315.95) 3655.17,3441.9 ; 3648.92,3229.4 ccw(c3652.01,3315.95) 3652.01,3229.34 ; 3649.49,3158.49 ccw(c3649.15,3155.65) 3649.2,3158.51 ; 3649.49,3473.41 cw(c3649.15,3476.26) 3649.2,3473.39 ; 3649.89,3166.36 ccw(c3649.15,3155.65) 3648.79,3166.38 ; 3649.89,3465.55 cw(c3649.15,3476.26) 3648.79,3465.53 ; 3650.18,3174.23 ccw(c3649.15,3155.65) 3648.77,3174.26 ; 3650.18,3457.67 cw(c3649.15,3476.26) 3648.77,3457.65 ; 3650.44,3182.11 ccw(c3649.15,3155.65) 3648.8,3182.13 ; 3650.44,3449.8 cw(c3649.15,3476.26) 3648.8,3449.77 ; 3650.66,3189.98 ccw(c3649.15,3155.65) 3619.39,3172.83 3594.13,3129.08 ccw(c3626.52,3110.69) 3624.3,3073.51 3680.17,3065.65 ccw(c3677.51,3110.69) 3716.58,3133.25 3691.46,3176.77 ccw(c3654.88,3155.65) 3655.09,3197.88 ; 3650.66,3441.93 cw(c3649.15,3476.26) 3619.39,3459.08 3594.13,3502.83 cw(c3626.52,3521.22) 3624.3,3558.4 3679.27,3550.53 cw(c3677.51,3521.22) 3702.94,3506.53 3677.82,3463.02 cw(c3654.88,3476.26) 3655.23,3449.77 cw(c3654.88,3476.26) 3653.59,3449.8 ; v1(3651.04,3114.73) 3678.06,3104.96 ; 3653.36,3189.98 cw(c3654.88,3155.65) 3684.64,3172.83 3709.9,3129.08 cw(c3677.51,3110.69) 3679.73,3073.51 3624.75,3081.37 cw(c3626.52,3110.69) 3601.08,3125.38 3626.21,3168.89 cw(c3649.15,3155.65) 3648.8,3182.13 ; 3653.36,3441.93 ccw(c3654.88,3476.26) 3684.64,3459.08 3709.9,3502.83 ccw(c3677.51,3521.22) 3679.73,3558.4 3623.85,3566.26 ccw(c3626.52,3521.22) 3587.44,3498.66 3612.57,3455.14 ccw(c3649.15,3476.26) 3648.93,3434.02 ; 3653.59,3182.11 cw(c3654.88,3155.65) 3655.23,3182.13 cw(c3654.88,3155.65) 3677.82,3168.89 3702.94,3125.38 cw(c3677.51,3110.69) 3679.27,3081.37 3625.52,3089.15 cw(c3626.52,3110.69) 3608.75,3122.92 3633.02,3164.96 cw(c3649.15,3155.65) 3648.77,3174.26 ; 3653.84,3174.23 cw(c3654.88,3155.65) 3655.25,3174.26 ; 3653.84,3457.67 ccw(c3654.88,3476.26) 3655.25,3457.65 ; 3654.14,3166.36 cw(c3654.88,3155.65) 3655.24,3166.38 ; 3654.14,3465.55 ccw(c3654.88,3476.26) 3655.24,3465.53 ; 3654.54,3158.49 cw(c3654.88,3155.65) 3654.83,3158.51 ; 3654.54,3473.41 ccw(c3654.88,3476.26) 3654.83,3473.39 ; 3655.11,3402.51 ccw(c3652.01,3315.95) 3652.01,3402.57 ; 3655.22,3182.13 cw(c3652.01,3315.95) 3652.01,3182.1 cw(c3652.01,3315.95) 3648.8,3182.13 ; 3655.22,3449.77 ccw(c3652.01,3315.95) 3652.01,3449.81 ccw(c3652.01,3315.95) 3648.8,3449.77 ; 3678.33,3105 ccw(c3677.51,3110.69) 3682.49,3113.57 3657.36,3157.08 ccw(c3654.88,3155.65) 3654.84,3158.51 ; 3708.95,3348.83 3727.02,3359.26 ccw(c3792.28,3393.62) 3790.79,3319.89 3842.52,3319.89 ccw(c3842.52,3396.51) 3912.97,3426.63 3872.09,3481.81 ccw(c3817.03,3440.67) 3757.5,3475.04 3731.53,3430.06 ccw(c3789.41,3398.59) 3733.84,3363.2 ccw(c3792.28,3393.62) 3790.59,3327.77 3842.52,3327.77 ccw(c3842.52,3396.51) 3905.69,3423.62 3866.32,3476.38 ccw(c3817.03,3440.67) 3764.32,3471.1 3738.26,3425.96 ccw(c3789.41,3398.59) 3738.77,3370.27 ; 3725.43,3269.99 ccw(c3652.01,3315.95) 3727.02,3272.65 ; 3759.51,3250.25 ccw(c3652.01,3315.95) 3761.12,3252.96 ccw(c3652.01,3315.95) 3762.66,3255.72 ; 3759.51,3381.66 cw(c3652.01,3315.95) 3761.12,3378.95 cw(c3652.01,3315.95) 3762.66,3376.19 ; 3760.44,3251.8 ccw(c3789.41,3233.32) 3759.65,3216.14 3784.91,3172.39 ccw(c3817.03,3191.24) 3848.12,3170.73 3882.86,3215.19 ccw(c3842.52,3235.4) 3842.52,3280.52 3792.28,3280.52 ccw(c3792.28,3238.28) 3755.81,3259.59 ; 3760.44,3380.11 cw(c3789.41,3398.59) 3759.65,3415.77 3784.91,3459.52 ; 3761.79,3254.13 cw(c3792.28,3238.28) 3792.28,3272.65 3842.8,3272.65 cw(c3842.52,3235.4) 3875.83,3218.73 3841.54,3175.06 cw(c3817.03,3191.24) 3791.59,3176.56 3766.47,3220.07 cw(c3789.41,3233.32) 3766.3,3246.26 ; 3761.79,3377.77 ccw(c3792.28,3393.62) 3792.28,3359.26 3842.8,3359.26 ccw(c3842.52,3396.51) 3875.83,3413.18 3841.54,3456.85 ccw(c3817.03,3440.67) 3791.59,3455.35 3766.47,3411.84 ccw(c3789.41,3398.59) 3766.3,3385.65 ; 3767.14,3247.67 ccw(c3789.41,3233.32) 3766.3,3246.26 ; 3767.14,3384.24 cw(c3789.41,3398.59) 3766.3,3385.65 ; v1(3768.59,3113.4) 3767.22,3124.29 3750.68,3152.94 3734.14,3181.58 3724.81,3197.74 cw(c3789.41,3233.32) 3727.02,3272.65 ; 3768.72,3250.39 cw(c3792.28,3238.28) 3769.51,3251.83 ; 3768.72,3381.51 ccw(c3792.28,3393.62) 3769.51,3380.08 ; v1(3770.08,3524.03) 3760.4,3511.56 3743.86,3482.91 3727.32,3454.26 3717.99,3438.11 cw(c3654.88,3476.26) 3652.01,3402.57 ; 3773.83,3243.51 ccw(c3789.41,3233.32) 3773.1,3242.3 ; 3773.83,3388.4 cw(c3789.41,3398.59) 3773.1,3389.61 ; 3775.66,3246.68 cw(c3792.28,3238.28) 3776.35,3247.91 ; 3775.66,3385.23 ccw(c3792.28,3393.62) 3776.35,3383.99 ; 3779.93,3238.38 ccw(c3652.01,3315.95) 3781.58,3241.15 ccw(c3652.01,3315.95) 3783.16,3243.96 ; 3780.5,3239.32 ccw(c3789.41,3233.32) 3779.93,3238.37 ccw(c3789.41,3233.32) 3780.11,3227.95 3805.23,3184.43 ccw(c3817.03,3191.24) 3828.21,3183.46 3861.68,3225.5 ccw(c3842.52,3235.4) 3840.82,3256.9 3792.28,3256.9 ccw(c3792.28,3238.28) 3776.35,3247.91 ; 3780.5,3392.59 cw(c3789.41,3398.59) 3779.93,3393.53 ; 3782.63,3243 cw(c3792.28,3238.28) 3783.16,3243.96 ; 3782.63,3388.91 ccw(c3792.28,3393.62) 3783.16,3387.95 ; 3784.91,3459.53 cw(c3817.03,3440.67) 3848.12,3461.18 3882.86,3416.72 cw(c3842.52,3396.51) 3842.52,3351.39 3792.28,3351.39 cw(c3792.28,3393.62) 3755.81,3372.32 ; 3787.12,3235.04 ccw(c3789.41,3233.32) 3786.95,3234.79 ; 3787.12,3396.87 cw(c3789.41,3398.59) 3786.95,3397.12 ; 3789.64,3239.41 cw(c3792.28,3238.28) 3789.77,3239.68 ; 3789.64,3392.5 ccw(c3792.28,3393.62) 3789.76,3392.25 ; v1(3825.79,3214.5) 3847.86,3233.27 ccw(c3842.52,3235.4) 3842.52,3241.15 3792.28,3241.15 ccw(c3792.28,3238.28) 3789.77,3239.68 ; v1(3826.77,3415.72) 3847.66,3399.14 ; 3847.86,3398.64 cw(c3842.52,3396.51) 3842.52,3390.76 3792.28,3390.76 cw(c3792.28,3393.62) 3789.77,3392.23 ; 3514.25,3392.23 3515.63,3394.69 3517.08,3397.12 ; 3517.08,3397.12 ccw(c3514.62,3398.59) 3517.1,3400.02 3491.98,3443.54 ccw(c3487,3440.67) 3482.48,3444.22 3482.15,3443.8 3449.17,3402.3 ccw(c3461.5,3396.51) 3461.5,3382.88 3511.75,3382.88 ccw(c3511.75,3393.62) 3520.87,3387.95 ; 3520.87,3243.96 ccw(c3511.75,3238.28) 3511.75,3249.03 3461.5,3249.03 ccw(c3461.5,3235.4) 3449.17,3229.61 3468.84,3179.61 ccw(c3487,3191.24) 3506.47,3181.97 3530.74,3224.01 ccw(c3514.62,3233.32) 3530.92,3242.3 ; 3520.87,3387.95 cw(c3652.01,3315.95) 3522.45,3390.76 cw(c3652.01,3315.95) 3524.09,3393.53 ; 3524.09,3393.53 ccw(c3514.62,3398.59) 3523.92,3403.96 3498.8,3447.48 ccw(c3487,3440.67) 3475.82,3448.45 3442.35,3406.41 ccw(c3461.5,3396.51) 3463.21,3375.01 3511.75,3375.01 ccw(c3511.75,3393.62) 3527.68,3383.99 ; 3527.68,3247.91 ccw(c3652.01,3315.95) 3529.27,3245.09 ccw(c3652.01,3315.95) 3530.92,3242.3 ; 3527.68,3247.91 ccw(c3511.75,3238.28) 3511.75,3256.9 3463.21,3256.9 ccw(c3461.5,3235.4) 3442.35,3225.5 3462.49,3175.06 ccw(c3487,3191.24) 3512.43,3176.56 3537.56,3220.07 ccw(c3514.62,3233.32) 3537.73,3246.26 ; 3527.68,3384 cw(c3652.01,3315.95) 3529.27,3386.82 cw(c3652.01,3315.95) 3530.92,3389.61 ; 3530.92,3389.61 ccw(c3514.62,3398.59) 3530.74,3407.9 3506.47,3449.94 ccw(c3487,3440.67) 3468.84,3452.3 3435.23,3409.64 ccw(c3461.5,3396.51) 3461.5,3367.14 3511.75,3367.14 ccw(c3511.75,3393.62) 3534.52,3380.08 ; 3534.52,3251.83 ccw(c3652.01,3315.95) 3536.09,3249.03 ccw(c3652.01,3315.95) 3537.73,3246.26 ; 3534.52,3380.08 cw(c3652.01,3315.95) 3536.09,3382.88 cw(c3652.01,3315.95) 3537.73,3385.65 ; 3548.22,3259.59 ccw(c3652.01,3315.95) 3549.16,3257.89 ; 3548.22,3259.59 cw(c3511.75,3238.28) 3549.16,3257.89 ; 3548.22,3259.59 ccw(c3511.75,3238.28) 3511.75,3280.52 3461.5,3280.52 ccw(c3461.5,3235.4) 3421.16,3215.19 3443.43,3161.07 ccw(c3487,3191.24) 3532.89,3164.75 3559.03,3210.02 ccw(c3514.62,3233.32) 3558.58,3257.46 cw(c3652.01,3315.95) 3556.55,3260.84 ccw(c3511.75,3238.28) 3513.78,3288.4 3461.5,3288.4 ccw(c3461.5,3235.4) 3413.59,3212.76 3437.71,3155.53 ccw(c3487,3191.24) 3539.71,3160.81 3565.77,3205.94 ccw(c3514.62,3233.32) 3565.25,3261.64 cw(c3652.01,3315.95) 3563.37,3264.77 ; 3548.22,3372.32 ccw(c3511.75,3393.62) 3549.16,3374.02 ; 3548.22,3372.32 cw(c3652.01,3315.95) 3549.16,3374.02 ; 3549.16,3257.89 ccw(c3652.01,3315.95) 3549.73,3256.9 ccw(c3652.01,3315.95) 3550.3,3255.91 ; 3549.16,3374.02 cw(c3652.01,3315.95) 3549.73,3375.01 cw(c3652.01,3315.95) 3550.3,3376 ; 3550.3,3255.91 cw(c3514.62,3233.32) 3551.3,3254.25 ; 3550.3,3255.91 ccw(c3652.01,3315.95) 3551.3,3254.25 ; 3550.3,3376 cw(c3652.01,3315.95) 3551.3,3377.66 ; 3550.3,3376 ccw(c3514.62,3398.59) 3551.3,3377.66 ; 3561.59,3267.98 cw(c3511.75,3238.28) 3563.36,3264.77 ; 3561.59,3267.98 ccw(c3652.01,3315.95) 3563.36,3264.77 ; 3563.36,3367.14 ccw(c3514.62,3398.59) 3565.25,3370.27 ; 3563.36,3367.14 cw(c3652.01,3315.95) 3565.25,3370.27 ; 3565.25,3370.27 ccw(c3514.62,3398.59) 3565.77,3425.96 3539.71,3471.1 ccw(c3487,3440.67) 3437.71,3476.38 3398.34,3423.62 ccw(c3461.5,3396.51) 3461.5,3327.77 3513.44,3327.77 ccw(c3511.75,3393.62) 3570.18,3363.2 ccw(c3514.62,3398.59) 3572.5,3430.06 3546.53,3475.04 ccw(c3487,3440.67) 3431.94,3481.82 3391.06,3426.63 ccw(c3461.5,3396.51) 3461.5,3319.89 3513.24,3319.89 ccw(c3511.75,3393.62) 3577,3359.26 ; 3618.41,3042.43 cw(c3626.52,3110.69) 3566.99,3145.06 3592.95,3190.04 cw(c3649.15,3155.65) 3652.01,3221.47 cw(c3654.88,3155.65) 3711.07,3190.04 3737.04,3145.06 cw(c3677.51,3110.69) 3685.61,3042.43 ; 3618.42,3042.43 3686.64,3034.62 ; 3618.42,3042.43 3686.64,3034.62 ; 3620.24,3050.15 cw(c3626.52,3110.69) 3573.81,3141.12 3599.86,3186.26 cw(c3649.15,3155.65) 3648.35,3213.66 ; 3620.24,3050.15 3685.61,3042.43 ; 3620.24,3050.15 3685.61,3042.43 ; 3648.35,3213.66 cw(c3649.15,3155.65) 3652.01,3213.59 ; 3648.35,3213.66 ccw(c3652.01,3315.95) 3652.01,3213.59 ; 3648.77,3174.26 ccw(c3652.01,3315.95) 3652.01,3174.22 ccw(c3652.01,3315.95) 3655.25,3174.26 ; 3648.77,3457.65 cw(c3649.15,3476.26) 3633.02,3466.95 3608.75,3508.99 cw(c3626.52,3521.22) 3625.52,3542.76 3678.66,3534.79 cw(c3677.51,3521.22) 3689.31,3514.41 3664.18,3470.89 cw(c3654.88,3476.26) 3655.24,3465.53 ; 3648.77,3457.65 cw(c3652.01,3315.95) 3652.01,3457.69 cw(c3652.01,3315.95) 3655.25,3457.65 ; 3648.79,3166.38 ccw(c3652.01,3315.95) 3652.01,3166.35 ccw(c3652.01,3315.95) 3655.24,3166.38 ; 3648.79,3166.38 ccw(c3649.15,3155.65) 3639.84,3161.02 3614.72,3117.5 ccw(c3626.52,3110.69) 3625.37,3097.12 3678.51,3089.15 ccw(c3677.51,3110.69) 3695.27,3122.92 3671,3164.96 ccw(c3654.88,3155.65) 3655.25,3174.26 ; 3648.8,3449.77 cw(c3649.15,3476.26) 3626.21,3463.02 3601.08,3506.53 cw(c3626.52,3521.22) 3624.75,3550.53 3678.51,3542.76 cw(c3677.51,3521.22) 3695.27,3508.99 3671,3466.95 cw(c3654.88,3476.26) 3655.25,3457.65 ; 3648.79,3465.53 cw(c3652.01,3315.95) 3652.01,3465.56 cw(c3652.01,3315.95) 3655.24,3465.53 ; 3648.79,3465.53 cw(c3649.15,3476.26) 3639.84,3470.89 3614.72,3514.41 cw(c3626.52,3521.22) 3625.37,3534.79 3677.8,3526.98 3678.33,3526.91 cw(c3677.51,3521.22) 3682.49,3518.34 3657.36,3474.83 cw(c3654.88,3476.26) 3654.84,3473.39 ; 3648.93,3197.88 cw(c3649.15,3155.65) 3650.87,3197.85 ; 3648.93,3197.88 ccw(c3652.01,3315.95) 3650.87,3197.85 ; 3648.93,3197.88 ccw(c3649.15,3155.65) 3612.57,3176.77 3587.44,3133.25 ccw(c3626.52,3110.69) 3623.85,3065.65 3681.85,3057.88 ccw(c3677.51,3110.69) 3723.4,3137.19 3697.26,3182.46 ccw(c3654.88,3155.65) 3655.96,3205.79 cw(c3652.01,3315.95) 3652.01,3205.72 ccw(c3649.15,3155.65) 3606.77,3182.47 3580.62,3137.19 ccw(c3626.52,3110.69) 3622.17,3057.88 3683.79,3050.15 ccw(c3677.51,3110.69) 3730.22,3141.12 3704.16,3186.26 ccw(c3654.88,3155.65) 3655.67,3213.66 cw(c3652.01,3315.95) 3652.01,3213.59 ; 3648.93,3434.02 ccw(c3649.15,3476.26) 3650.87,3434.06 ; 3648.93,3434.02 cw(c3652.01,3315.95) 3650.87,3434.06 ; 3649.18,3158.51 ccw(c3649.15,3155.65) 3646.66,3157.08 3621.54,3113.57 ccw(c3626.52,3110.69) 3625.7,3105 3626.22,3104.93 3678.66,3097.12 ccw(c3677.51,3110.69) 3689.31,3117.5 3664.18,3161.02 ccw(c3654.88,3155.65) 3655.24,3166.38 ; 3649.2,3158.51 3652.01,3158.47 3654.83,3158.51 ; 3649.2,3473.39 3652.01,3473.43 3654.83,3473.39 ; 3650.87,3197.85 ccw(c3652.01,3315.95) 3652.01,3197.84 ccw(c3652.01,3315.95) 3653.16,3197.85 ; 3650.87,3434.06 cw(c3652.01,3315.95) 3652.01,3434.06 cw(c3652.01,3315.95) 3653.16,3434.06 ; 3652.01,3229.34 cw(c3654.88,3155.65) 3717.99,3193.8 3727.32,3177.65 3743.86,3149 cw(c3677.51,3110.69) 3686.64,3034.62 ; 3652.01,3402.57 cw(c3649.15,3476.26) 3586.04,3438.11 3576.71,3454.26 3560.17,3482.91 cw(c3626.52,3521.22) 3617.39,3597.29 3685.61,3589.48 cw(c3677.51,3521.22) 3737.04,3486.85 3711.07,3441.87 cw(c3654.88,3476.26) 3652.01,3410.44 cw(c3649.15,3476.26) 3592.96,3441.87 3566.99,3486.85 cw(c3626.52,3521.22) 3618.42,3589.48 3683.79,3581.76 cw(c3677.51,3521.22) 3730.22,3490.78 3704.16,3445.65 cw(c3654.88,3476.26) 3655.67,3418.25 ; 3652.01,3418.32 cw(c3652.01,3315.95) 3655.67,3418.25 ; 3652.01,3418.32 ccw(c3654.88,3476.26) 3655.67,3418.25 ; 3652.01,3418.32 ccw(c3652.01,3315.95) 3648.35,3418.25 cw(c3649.15,3476.26) 3599.86,3445.65 3573.81,3490.78 cw(c3626.52,3521.22) 3620.24,3581.76 3681.85,3574.03 cw(c3677.51,3521.22) 3723.4,3494.72 3697.26,3449.44 cw(c3654.88,3476.26) 3652.01,3426.19 ccw(c3652.01,3315.95) 3648.07,3426.12 cw(c3649.15,3476.26) 3606.77,3449.44 3580.62,3494.72 cw(c3626.52,3521.22) 3622.17,3574.03 3680.17,3566.26 cw(c3677.51,3521.22) 3716.58,3498.66 3691.46,3455.14 cw(c3654.88,3476.26) 3655.09,3434.02 ; 3653.16,3197.85 cw(c3654.88,3155.65) 3655.09,3197.88 ; 3653.16,3197.85 ccw(c3652.01,3315.95) 3655.09,3197.88 ; 3653.16,3434.06 cw(c3652.01,3315.95) 3655.09,3434.02 ; 3653.16,3434.06 ccw(c3654.88,3476.26) 3655.09,3434.02 ; 3727.02,3272.65 cw(c3792.28,3238.28) 3790.79,3312.02 3842.52,3312.02 cw(c3842.52,3235.4) 3912.97,3205.28 3872.09,3150.1 cw(c3817.03,3191.24) 3757.5,3156.87 3731.53,3201.85 cw(c3789.41,3233.32) 3733.84,3268.71 cw(c3792.28,3238.28) 3790.59,3304.14 3842.52,3304.14 cw(c3842.52,3235.4) 3905.69,3208.29 3866.32,3155.53 cw(c3817.03,3191.24) 3764.32,3160.81 3738.26,3205.94 cw(c3789.41,3233.32) 3738.77,3261.64 ; 3738.77,3261.64 ccw(c3652.01,3315.95) 3740.66,3264.77 ; 3738.77,3261.64 cw(c3789.41,3233.32) 3740.66,3264.77 ; 3738.77,3370.27 cw(c3652.01,3315.95) 3740.66,3367.14 ; 3738.77,3370.27 ccw(c3789.41,3398.59) 3740.66,3367.14 ; 3740.66,3264.77 ccw(c3652.01,3315.95) 3742.43,3267.98 cw(c3792.28,3238.28) 3790.4,3296.27 3842.52,3296.27 cw(c3842.52,3235.4) 3898.09,3210.57 3860.59,3161.07 cw(c3817.03,3191.24) 3771.14,3164.75 3744.99,3210.02 cw(c3789.41,3233.32) 3747.48,3260.84 ccw(c3652.01,3315.95) 3749.39,3264.29 cw(c3792.28,3238.28) 3790.24,3288.4 3842.52,3288.4 cw(c3842.52,3235.4) 3890.44,3212.76 3854.7,3166.42 cw(c3817.03,3191.24) 3777.95,3168.68 3752.83,3212.2 cw(c3789.41,3233.32) 3752.72,3254.25 ; 3740.66,3367.13 cw(c3652.01,3315.95) 3742.43,3363.93 ccw(c3792.28,3393.62) 3790.41,3335.64 3842.52,3335.64 ccw(c3842.52,3396.51) 3898.09,3421.34 3860.59,3470.84 ccw(c3817.03,3440.67) 3771.14,3467.16 3744.99,3421.89 ccw(c3789.41,3398.59) 3747.48,3371.07 cw(c3652.01,3315.95) 3749.39,3367.62 ccw(c3792.28,3393.62) 3790.24,3343.51 3842.52,3343.51 ccw(c3842.52,3396.51) 3890.44,3419.15 3854.7,3465.49 ccw(c3817.03,3440.67) 3777.95,3463.23 3752.83,3419.71 ccw(c3789.41,3398.59) 3752.72,3377.66 ; 3752.72,3254.25 ccw(c3652.01,3315.95) 3753.72,3255.91 ; 3752.72,3254.25 cw(c3789.41,3233.32) 3753.72,3255.91 ; 3752.72,3377.66 ccw(c3789.41,3398.59) 3753.72,3376 ; 3752.72,3377.66 cw(c3652.01,3315.95) 3753.72,3376 ; 3753.72,3255.91 ccw(c3652.01,3315.95) 3754.3,3256.9 ccw(c3652.01,3315.95) 3754.87,3257.89 ; 3753.72,3376 cw(c3652.01,3315.95) 3754.3,3375.01 cw(c3652.01,3315.95) 3754.87,3374.02 ; 3754.87,3257.89 cw(c3792.28,3238.28) 3755.81,3259.59 ; 3754.87,3257.89 ccw(c3652.01,3315.95) 3755.81,3259.59 ; 3754.87,3374.02 ccw(c3792.28,3393.62) 3755.81,3372.32 ; 3754.87,3374.02 cw(c3652.01,3315.95) 3755.81,3372.32 ; 3766.3,3246.26 ccw(c3652.01,3315.95) 3767.94,3249.03 ccw(c3652.01,3315.95) 3769.51,3251.83 ; 3766.3,3385.65 cw(c3652.01,3315.95) 3767.94,3382.88 cw(c3652.01,3315.95) 3769.51,3380.08 ; 3769.51,3251.83 cw(c3792.28,3238.28) 3792.28,3264.77 3842.52,3264.77 cw(c3842.52,3235.4) 3868.8,3222.27 3835.18,3179.61 cw(c3817.03,3191.24) 3797.56,3181.97 3773.29,3224.01 cw(c3789.41,3233.32) 3773.1,3242.3 ; 3769.51,3380.08 ccw(c3792.28,3393.62) 3792.28,3367.14 3842.52,3367.14 ccw(c3842.52,3396.51) 3868.8,3409.64 3835.18,3452.3 ccw(c3817.03,3440.67) 3797.56,3449.94 3773.29,3407.9 ccw(c3789.41,3398.59) 3773.1,3389.61 ; 3773.11,3242.3 ccw(c3652.01,3315.95) 3774.76,3245.09 ccw(c3652.01,3315.95) 3776.34,3247.91 ; 3773.11,3389.61 cw(c3652.01,3315.95) 3774.76,3386.82 cw(c3652.01,3315.95) 3776.34,3384 ; 3776.35,3383.99 ccw(c3792.28,3393.62) 3792.28,3375.01 3840.82,3375.01 ccw(c3842.52,3396.51) 3861.68,3406.41 3828.21,3448.45 ccw(c3817.03,3440.67) 3805.23,3447.48 3780.11,3403.96 ccw(c3789.41,3398.59) 3779.93,3393.53 ; 3779.93,3393.53 cw(c3652.01,3315.95) 3781.58,3390.76 cw(c3652.01,3315.95) 3783.16,3387.95 ; 3783.16,3243.96 cw(c3792.28,3238.28) 3792.28,3249.03 3842.52,3249.03 cw(c3842.52,3235.4) 3854.85,3229.61 3821.87,3188.11 3821.55,3187.69 cw(c3817.03,3191.24) 3812.05,3188.37 3786.93,3231.88 cw(c3789.41,3233.32) 3786.95,3234.79 ; 3783.16,3387.95 ccw(c3792.28,3393.62) 3792.28,3382.88 3842.52,3382.88 ccw(c3842.52,3396.51) 3854.85,3402.3 3821.87,3443.8 3821.55,3444.22 ccw(c3817.03,3440.67) 3812.05,3443.54 3786.93,3400.02 ccw(c3789.41,3398.59) 3786.95,3397.12 ; 3786.95,3234.79 3788.4,3237.21 3789.77,3239.68 ; 3786.95,3397.12 3788.4,3394.69 3789.76,3392.25
  Mid-Layer 1 w10: 3452.01,2721.27 3496.23,2677.06 v2(3521.75,2677.06) ; v2(3452.77,3019.48) 3453.81,3019.48 3487.01,2986.27 3487.01,2751.27 3521.86,2716.43 v2(3523.06,2716.43) ; 3453.12,2721.27 v2(3453.12,2980.34) ; v2(3519.93,2637.69) 3562.01,2679.78 3562.01,2686.27 3562.01,2811.27 3587.01,2836.27 3707.01,2836.27 3722.01,2821.27 3777.01,2821.27 3812.01,2856.27 3852.01,2896.27 3852.01,2976.27 3832.01,2996.27 v2(3812.01,2996.27)
  Mid-Layer 1 w11.81: 3596.77,3284.06 ccw(c3652.01,3315.95) 3707.25,3347.85